# Allegro board ANALYSIS_0109_3.brd
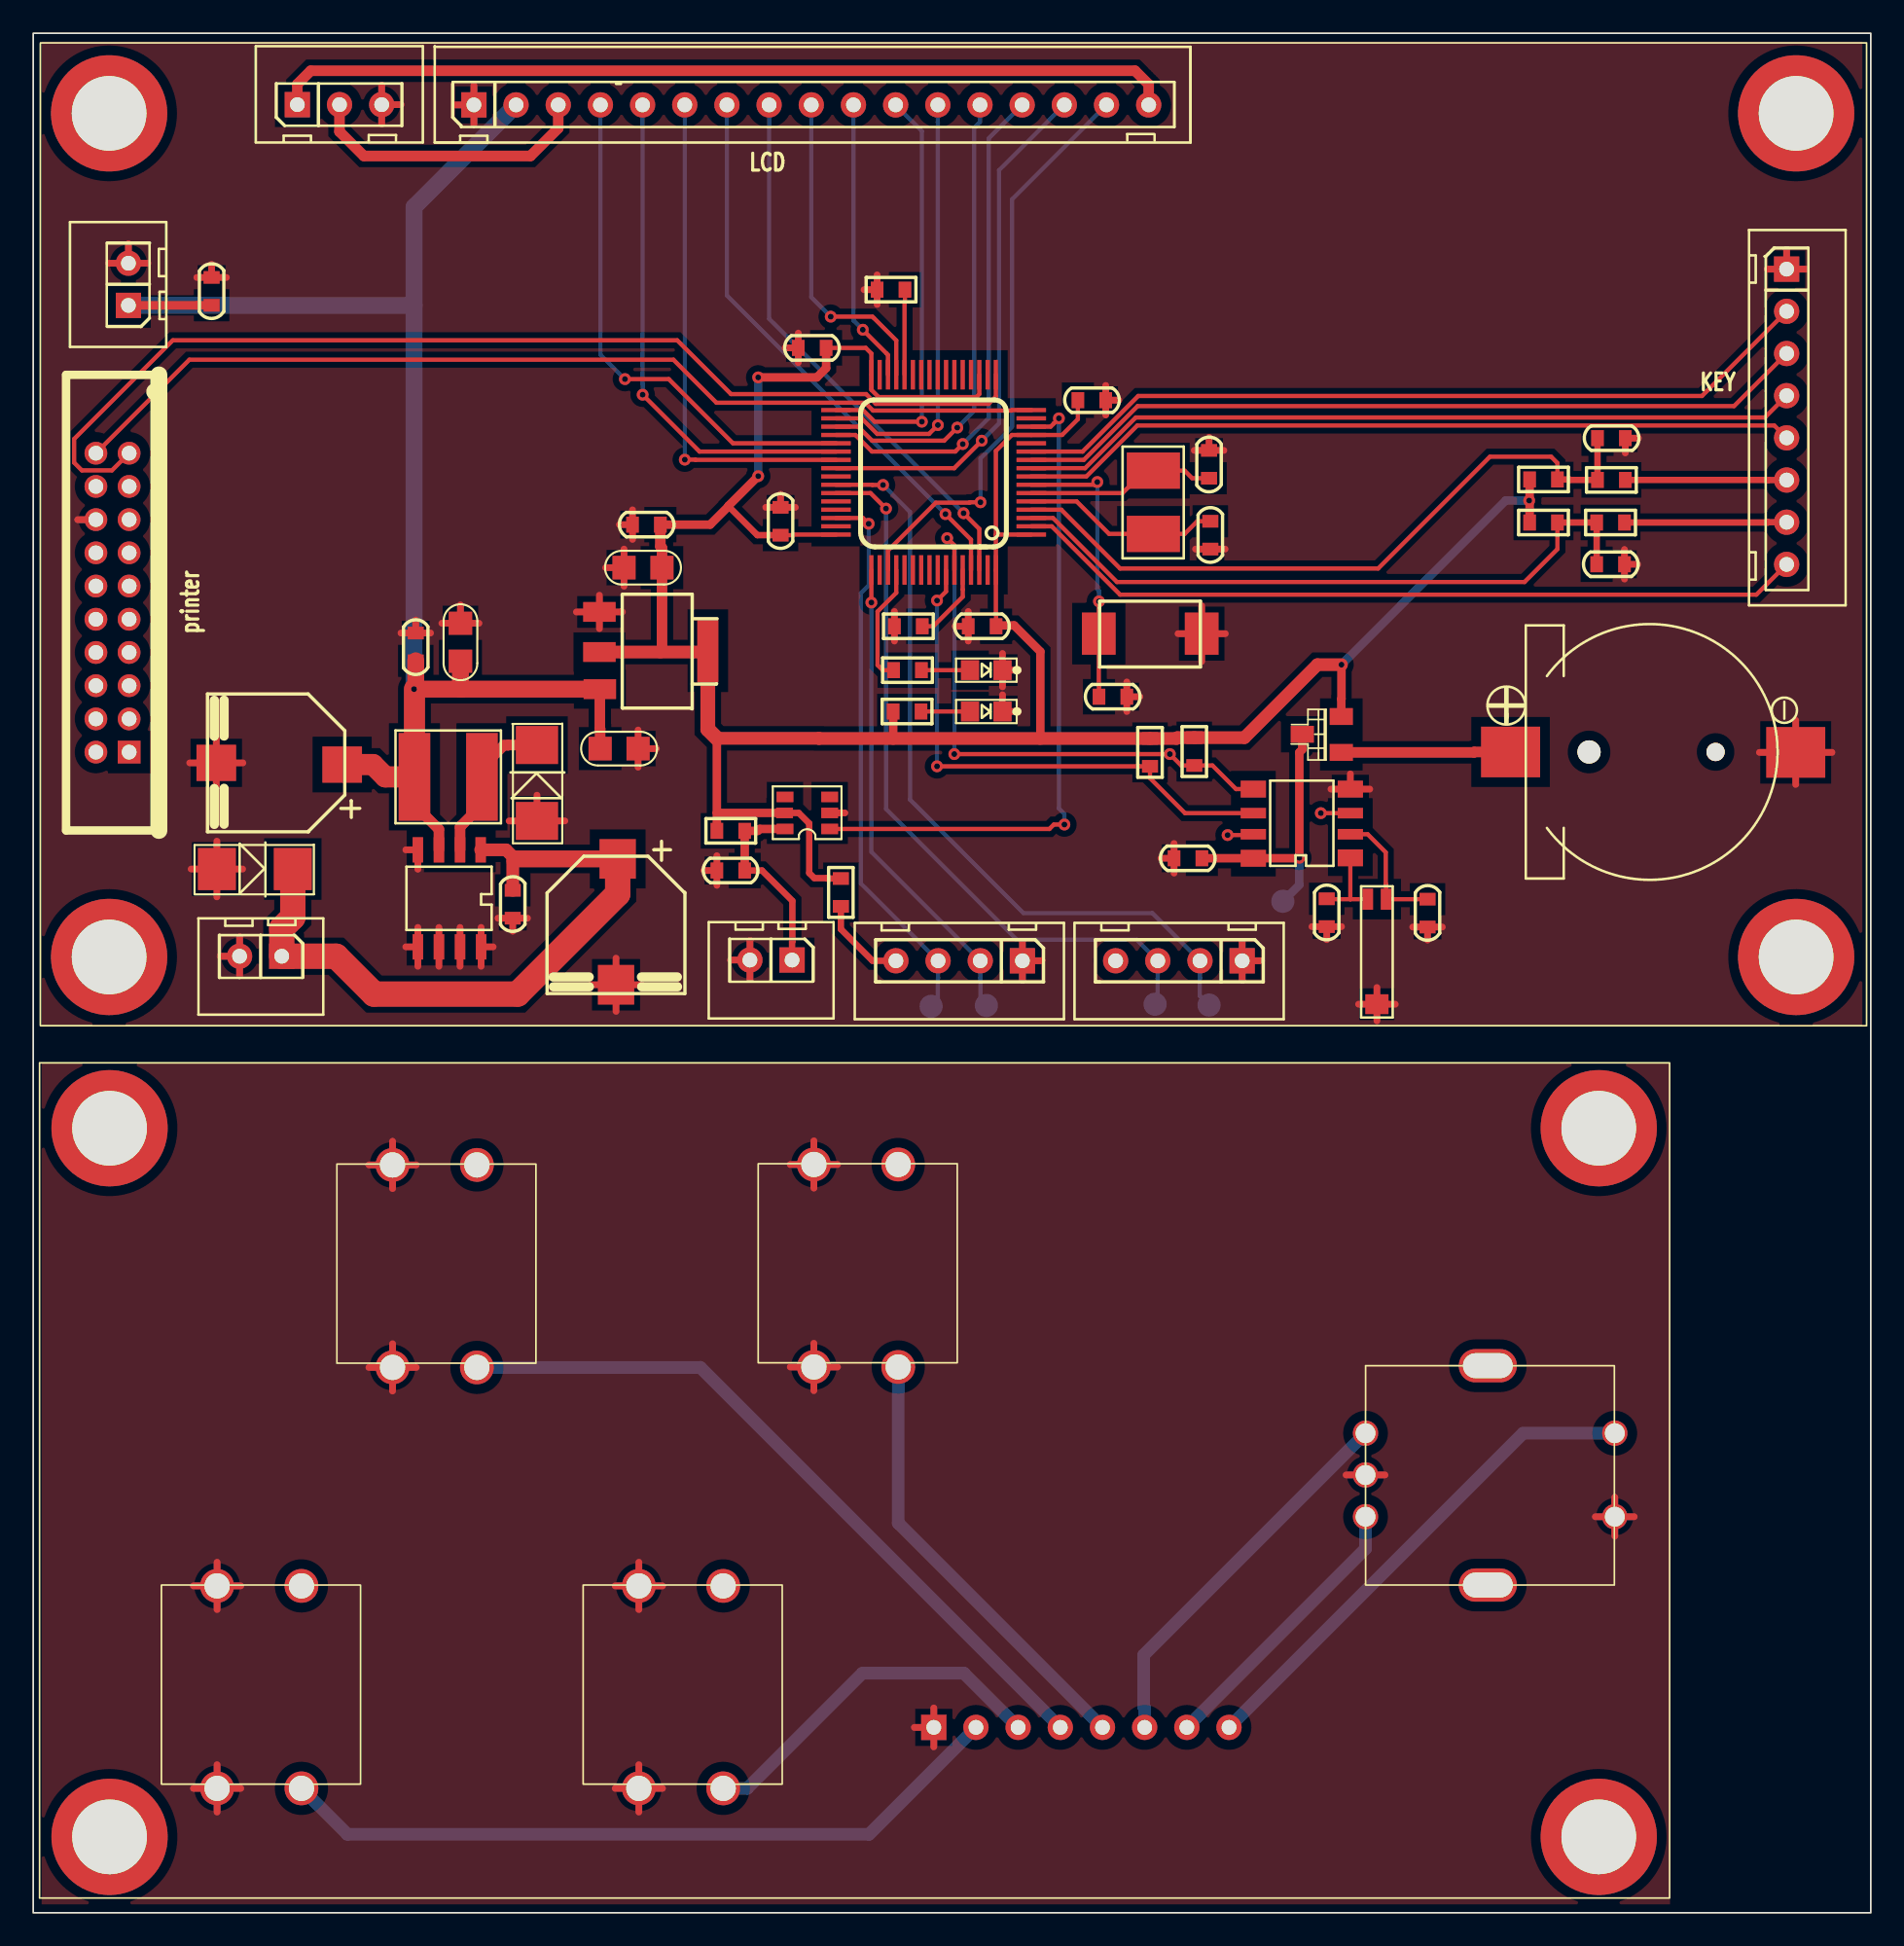
[diagram p0: board, top side]
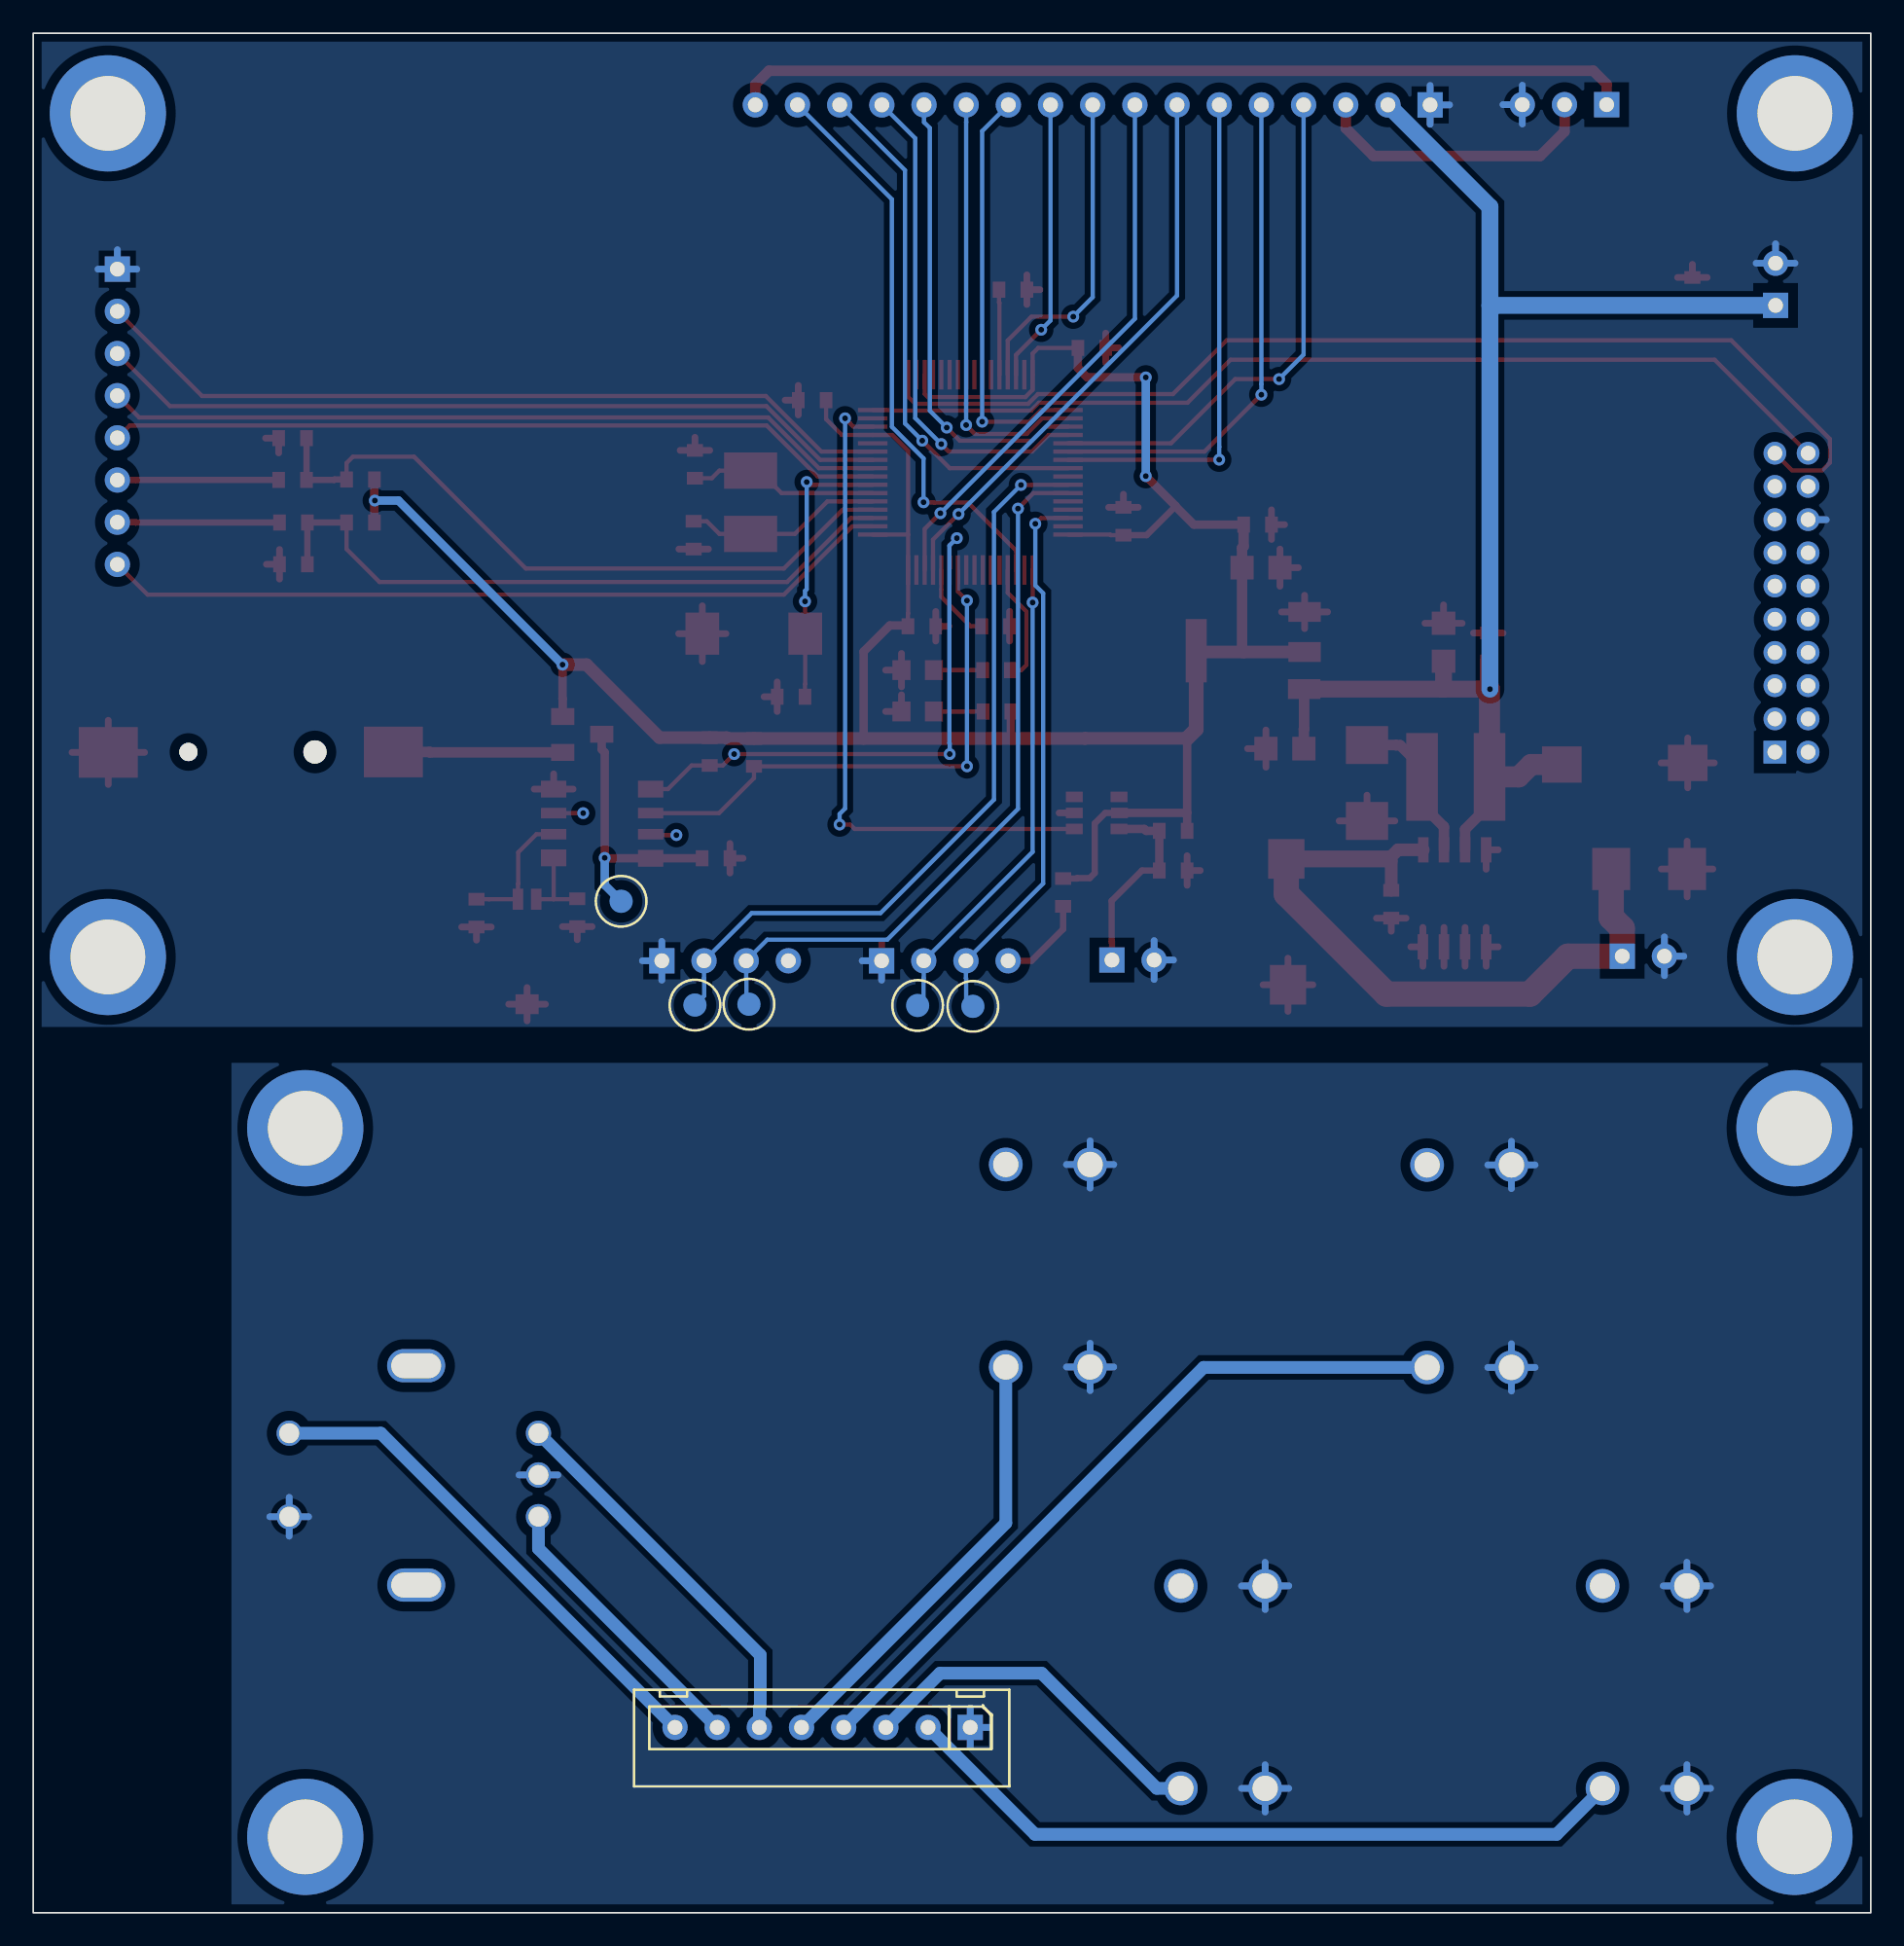
[diagram p1: board, bottom side, seen from below]

Outline 110.67 x 113.18 mm; copper layers: TOP, BOTTOM. Coordinates in mm from the lower left corner of the outline.
Outline path: rectangle 0,0 110.67,113.18

## Placement (name value [footprint] x y rotation side)
C1  0.1uF  [C0603]  46.91 94.23 180 top
C2  0.1uF  [C0603]  63.75 91.08 0 top
C3  0.1uF  [C0603]  45.01 83.79 90 top
C4  0.1uF  [C0603]  10.74 97.64 90 top
C5  0.1uF  [C0603]  42.01 62.76 180 top
C6  0.1uF  [C0603]  57.15 77.47 180 top
C7  15pF  [C0603]  70.82 87.22 270 top
C8  15pF  [C0603]  70.89 82.96 90 top
C9  0.1uF  [C0603]  65.02 73.23 180 top
C10  0.1uF  [C0603]  95 81.2 0 top
C11  0.1uF  [C0603]  95.05 88.8 0 top
C12  0.1uF  [C0603]  69.55 63.5 180 top
C13  5pF  [C0603]  83.97 60.2 90 top
C14  5pF  [C0603]  77.9 60.22 90 top
C15  220uf/35V  [CAP_SMD_8X10D5]  40.15 61.64 270 top
C16  0.1uF  [C0603]  28.88 60.73 90 top
C17  220uf/35V  [CAP_SMD_8X10D5]  16.79 64.19 180 top
C18  0.1uF  [C0603]  23.04 76.23 270 top
C19  10uF  [C0805]  25.73 76.51 270 top
C20  10uF  [C0805]  36.72 81 0 top
C21  10uF  [C0805]  35.28 70.1 180 top
C22  0.1uF  [C0603]  36.93 83.59 0 top
D1  BAT54C  [SOT23-3]  77.61 70.97 0 top
D2  SMBJ12A  [SMA]  13.35 62.85 180 top
D3  SS34  [SMA]  30.34 68.03 270 top
H1  NC/mechanical _pad  [HOLE_4D5MM]  4.57 57.56 0 top
H2  NC/mechanical _pad  [HOLE_4D5MM]  4.57 108.36 0 top
H3  NC/mechanical _pad  [HOLE_4D5MM]  106.17 108.36 0 top
H4  NC/mechanical _pad  [HOLE_4D5MM]  106.17 57.56 0 top
H5  NC/mechanical _pad  [HOLE_4D5MM]  4.6 47.24 0 top
H6  NC/mechanical _pad  [HOLE_4D5MM]  4.6 4.57 0 top
H7  NC/mechanical _pad  [HOLE_4D5MM]  94.28 4.57 0 top
H8  NC/mechanical _pad  [HOLE_4D5MM]  94.28 47.24 0 top
J1  HEADER 8  [XH-8A]  54.23 11.15 0 bottom
J2  HEADER 5  [SW3_2]  85.32 26.09 0 top
J3  -  [XH-2A]  5.73 96.79 90 top
J4  HEADER 20X2  [HEADER10X2_2MMP]  4.78 78.89 180 top
J5  HEADER 2  [XH-2A]  45.7 57.37 180 top
J8  HEADER 8  [XH-8A]  105.61 98.98 270 top
J9  LCD  [XH-17A]  29.48 95.62 0 top
JP_1  -  [XH-2A]  14.97 57.6 180 top
JP_SWD1  -  [XH-4A]  59.58 57.33 180 top
JS_BAT1  BAT  [CR1220_SOCKET_V1]  97.26 69.9 270 top
JS_USART1  NC/XH-4A  [XH-4A]  72.81 57.33 180 top
KS_REST  KEY_3x6x2d5_2p_SMD  [KEY_3X6X2D5_2P_SMD]  67.22 77.2 0 top
L1  47UH  [CD54]  24.99 68.4 90 top
LED0  LED  [LED0603]  57.41 72.34 180 top
LED1  LED  [LED0603]  57.41 74.83 180 top
NOREF  -  []  0.38 0.89 0 top
NOREF#2  -  []  4.6 4.57 90 top
NOREF#3  -  []  4.6 4.57 0 top
NOREF#4  -  []  49.56 40.23 90 top
NOREF#5  -  []  0.43 53.42 90 top
NOREF#6  -  []  0.38 0.89 90 top
NOREF#7  -  []  4.57 57.56 90 top
NOREF#8  -  []  49.56 39.19 0 top
NOREF#9  -  []  4.57 108.36 0 top
NOREF#10  -  []  0.43 112.6 0 top
R1  220K  [R0603]  42.01 65.15 180 top
R2  10K  [R0603]  90.96 83.72 180 top
R3  10K  [R0603]  90.96 86.31 180 top
R4  10K  [R0603]  52.7 77.47 0 top
R5  10K  [R0603]  51.66 97.74 0 top
R6  10K  [R0603]  95.05 86.28 180 top
R7  10K  [R0603]  95 83.72 180 top
R8  10R  [R0603]  48.64 61.44 90 top
R9  10k  [XH-3A]  15.91 108.88 0 top
R10  10K  [R0603]  67.26 69.88 270 top
R11  10K  [R0603]  69.93 69.93 270 top
R13  3.3K  [R0603]  52.63 72.34 180 top
R14  3.3K  [R0603]  52.65 74.83 180 top
SW1  SW PUSHBUTTON_0  [SW4L]  16.15 7.49 180 top
SW2  SW PUSHBUTTON_0  [SW4L]  41.55 7.49 180 top
SW3  SW PUSHBUTTON_0  [SW4L]  26.72 32.84 180 top
SW4  SW PUSHBUTTON_0  [SW4L]  52.1 32.87 180 top
T1  NC/TEST  [TEST_55C_SMD]  54.08 54.58 180 bottom
T2  NC/TEST  [TEST_55C_SMD]  57.4 54.64 180 bottom
T3  NC/TEST  [TEST_55C_SMD]  75.26 60.91 180 bottom
T4  NC/TEST  [TEST_55C_SMD]  67.56 54.71 180 bottom
T5  NC/TEST  [TEST_55C_SMD]  70.82 54.66 180 bottom
U1  USBLC6-2SC6  [SOT23-6]  46.62 66.23 90 top
U2  STM32F103RB  [LQFP64]  54.23 86.74 180 top
U3  PCF8563T  [SOP8]  79.07 63.68 90 top
U4  XL1509-5.0  [SOIC8]  25.07 61.09 180 top
U5  LM1117-3.3  [SOT-223]  34.15 76 270 top
Y1  8M  [CY5032_2P]  67.46 84.94 90 top
Y2  32.768KHz  [MC_146]  80.92 57.86 270 top

## Library data of the parts
C1-C22 = C
D1 = BAT54C
D2 D3 = DIODE
H1-H8 = PAD
J1 J8 = HEADER 10_0
J2 = 4 HEADER_2
J3 J5 = HEADER 2
J4 = HEADER 10X2_2
J9 = HEADER 22_1
JP_1 = header_3d5_6
JP_SWD1 JS_USART1 = HEADER 4
JS_BAT1 = BATT
KS_REST SW1-SW4 = SW PUSHBUTTON_0
L1 = INDUCTOR_0
LED0 LED1 = LED0603
R1-R8 R10 R11 R13 R14 = R
R9 = R_var_0
T1-T5 = TESTPONT
U1 = USB_MINI_SOCKET_5
U2 = STM32F103
U3 = PCF8563
U4 = XL1509
U5 = 1117
Y1 = CRYSTAL
Y2 = MC_146

## Footprints (pads in the part's own frame, mm; a bottom-side part is the same pattern mirrored in y, then rotated)
C0603
  rect 0.762x0.965 smd: 1(-0.838,0) 2(0.838,0)
C0805
  rect 1.397x1.422 smd: 1(-1.143,0) 2(1.143,0)
CAP_SMD_8X10D5
  rect 2.388x2.184 smd: 1(-1.82,-4.95) 2(5.76,-5.05)
CD54
  rect 5.283x1.905 smd: 1(0,2.032) 2(0,-2.032)
CR1220_SOCKET_V1
  round 1.397 hole 1.397 unplated: (0,-3.556)
  rect 3.048x3.556 smd: 1(0,-8.28) 2(0.025,8.89)
  round 1.092 hole 1.092: 3(0,4.064)
CY5032_2P
  rect 2.184x3.2 smd: 1(-1.905,0) 2(1.905,0)
HEADER10X2_2MMP
  rect 1.372x1.372 hole 0.889: 1(-1,9)
  round 1.372 hole 0.889: 2(1,9) 3(-1,7) 4(1,7) 5(-1,5) 6(1,5) 7(-1,3) 8(1,3) 9(-1,1) 10(1,1) 11(-1,-1) 12(1,-1) 13(-1,-3) 14(1,-3) 15(-1,-5) 16(1,-5) 17(-1,-7) 18(1,-7) 19(-1,-9) 20(1,-9)
HOLE_4D5MM
  round 7 hole 4.5: 1(0,0)
KEY_3X6X2D5_2P_SMD
  rect 2.032x2.54 smd: 1(-3.048,-0.178) 2(3.15,-0.178)
LED0603
  rect 1.092x1.194 smd: 1(0.991,0) 2(-0.965,0)
LQFP64
  rect 1.778x0.254 smd: 1(-5.88,3.749) 2(-5.88,3.251) 3(-5.88,2.751) 4(-5.88,2.25) 5(-5.88,1.75) 6(-5.88,1.25) 7(-5.88,0.749) 8(-5.88,0.249) 9(-5.88,-0.249) 10(-5.88,-0.749) 11(-5.88,-1.25) 12(-5.88,-1.75) 13(-5.88,-2.25) 14(-5.88,-2.751) 15(-5.88,-3.251) 16(-5.88,-3.749) 33(5.88,-3.749) 34(5.88,-3.251) 35(5.88,-2.751) 36(5.88,-2.25) 37(5.88,-1.75) 38(5.88,-1.25) 39(5.88,-0.749) 40(5.88,-0.249) 41(5.88,0.249) 42(5.88,0.749) 43(5.88,1.25) 44(5.88,1.75) 45(5.88,2.25) 46(5.88,2.751) 47(5.88,3.251) 48(5.88,3.749)
  rect 0.254x1.778 smd: 17(-3.749,-5.88) 18(-3.251,-5.88) 19(-2.751,-5.88) 20(-2.25,-5.88) 21(-1.75,-5.88) 22(-1.25,-5.88) 23(-0.749,-5.88) 24(-0.249,-5.88) 25(0.249,-5.88) 26(0.749,-5.88) 27(1.25,-5.88) 28(1.75,-5.88) 29(2.25,-5.88) 30(2.751,-5.88) 31(3.251,-5.88) 32(3.749,-5.88) 49(3.749,5.88) 50(3.251,5.88) 51(2.751,5.88) 52(2.25,5.88) 53(1.75,5.88) 54(1.25,5.88) 55(0.749,5.88) 56(0.249,5.88) 57(-0.249,5.88) 58(-0.749,5.88) 59(-1.25,5.88) 60(-1.75,5.88) 61(-2.25,5.88) 62(-2.751,5.88) 63(-3.251,5.88) 64(-3.749,5.88)
MC_146
  rect 1.27x0.635 smd: 1(-3.173,0.55) 2(-3.173,-0.55)
  rect 1.194x1.397 smd: 3(3.15,0)
R0603
  rect 0.762x0.965 smd: 1(-0.838,0) 2(0.838,0)
SMA
  rect 2.286x2.54 smd: 1(2.286,0) 2(-2.286,0)
SOIC8
  rect 0.635x1.524 smd: 1(-1.88,-2.921) 2(-0.635,-2.921) 3(0.635,-2.921) 4(1.905,-2.921) 5(1.905,2.921) 6(0.635,2.921) 7(-0.635,2.921) 8(-1.905,2.921)
SOP8
  rect 1.016x1.524 smd: 1(-0.152,-0.254) 4(3.988,-0.254) 5(3.988,5.588) 8(-0.178,5.588)
  rect 0.635x1.524 smd: 2(1.27,-0.254) 3(2.54,-0.254) 6(2.54,5.588) 7(1.27,5.588)
SOT23-3
  rect 1.397x1.016 smd: 1(1.168,-1.092) 2(1.168,1.067) 3(-1.181,0)
SOT23-6
  rect 0.635x1.016 smd: 1(-0.965,-1.346) 2(0,-1.346) 3(0.965,-1.346) 4(0.965,1.346) 5(0,1.372) 6(-0.965,1.346)
SOT-223
  rect 1.194x1.956 smd: 1(-2.337,-0.051) 2(0.076,-0.051) 3(2.311,-0.025)
  rect 3.81x1.27 smd: 4(0,6.477)
SW3_2
  round 1.524 hole 1.194: 1(-5.08,2.794) 2(-5.08,0.279) 3(-5.08,-2.235) 4(9.931,2.794) 5(9.931,-2.235)
  oval 3.5x2 hole 3x1.5: 6(2.286,6.858) 7(2.286,-6.35)
SW4L
  round 2.032 hole 1.524: 1(0,0) 2(0,-12.192) 3(5.08,0) 4(5.08,-12.192)
TEST_55C_SMD
  round 1.397 smd: 1(0,0)
XH-2A
  rect 1.524x1.524 hole 0.889: 1(0,0)
  round 1.524 hole 0.889: 2(2.54,0)
XH-3A
  rect 1.524x1.524 hole 0.889: 1(0,0)
  round 1.524 hole 0.889: 2(2.54,0) 3(5.08,0)
XH-4A
  rect 1.524x1.524 hole 0.889: 1(0,0)
  round 1.524 hole 0.889: 2(2.54,0) 3(5.08,0) 4(7.62,0)
XH-8A
  rect 1.524x1.524 hole 0.889: 1(0.005,-0.013)
  round 1.524 hole 0.889: 2(2.545,-0.013) 3(5.085,-0.013) 4(7.625,-0.013) 5(10.165,-0.013) 6(12.705,-0.013) 7(15.245,-0.013) 8(17.785,-0.013)
XH-17A
  rect 1.524x1.524 hole 0.889: 1(-2.942,13.25)
  round 1.524 hole 0.889: 2(-0.402,13.25) 3(2.138,13.25) 4(4.678,13.25) 5(7.218,13.25) 6(9.758,13.25) 7(12.298,13.25) 8(14.838,13.25) 9(17.378,13.25) 10(19.918,13.25) 11(22.458,13.25) 12(24.998,13.25) 13(27.538,13.25) 14(30.078,13.25) 15(32.618,13.25) 16(35.158,13.25) 17(37.698,13.25)

## Nets
GND: C1.2 C2.2 C3.2 C4.2 C5.2 C6.2 C7.1 C8.1 C9.1 C10.2 C11.2 C12.2 C13.1 C14.1 C15.2 C16.1 C17.2 C18.1 C19.1 C20.1 C21.1 C22.1 D2.1 D3.1 J1.1 J2.2(G1) J2.5(G2) J3.2 J4.16(GND) J5.2 J8.1 J9.1(VSS) JP_1.2 JP_SWD1.1 JS_BAT1.2(-) JS_USART1.1 KS_REST.2 LED0.2(CATHODE) LED1.2(CATHODE) R4.1 R5.1 R9.3 SW1.3 SW1.4 SW2.3 SW2.4 SW3.3 SW3.4 SW4.3 SW4.4 U1.2(GND) U2.12(VSSA) U2.18(VSS_4) U2.31(VSS_1) U2.47(VSS_2) U2.63(VSS_3) U3.4(VSS) U4.4(EN) U4.5(GND1) U4.6(GND2) U4.7(GND3) U4.8(GND4) U5.1 Y2.3(GND)
VCC_5V: C4.1 C17.1 C18.2 C19.2 C21.2 J3.1 J9.2(VDD) L1.1 U4.3(FB) U5.3(IN)
VCC_9V: C15.1 C16.2 D2.2 JP_1.1 U4.1(VIN)
VDD_3V3: C1.1 C2.1 C3.1 C6.1 C20.2 C22.2 D1.2(C2) R1.2 R2.2 R3.2 R8.2 R10.1 R11.1 R13.2 U1.5(VBUS) U2.1(VBAT) U2.13(VDDA) U2.19(VDD_4) U2.32(VDD_1) U2.48(VDD_2) U2.64(VDD_3) U5.2(OUT) U5.4
BOOT0: R4.2 U2.60(BOOT0)
BOOT1: R5.2 U2.28(PB2/BOOT1)
EC11_A: C11.1 R3.1 R6.2 U2.4(PC15-OSC32_OUT)
EC11_B: C10.1 R2.1 R7.2 U2.3(PC14-OSC32_IN)
EC11_C: J8.8 U2.2(PC13-TAMPER-RTC)
EC11_K: J1.8 J2.4(KEY)
I2C1_SCL: R10.2 U2.58(PB6/I2C1_SCL/USART1_TX) U3.6(SCL)
I2C1_SDA: R11.2 U2.59(PB7/I2C1_SDA/USART1_RX) U3.5(SDA)
KEY1: J1.2 SW1.1
KEY2: J1.3 SW2.1
KEY3: J1.4 SW3.1
KEY4: J1.5 SW4.1
KEY_1: J8.2 U2.11(PC3/ADC12_IN13)
KEY_2: J8.3 U2.10(PC2/ADC12_IN12)
KEY_3: J8.4 U2.9(PC1/ADC12_IN11)
KEY_4: J8.5 U2.8(PC0/ADC12_IN10)
PB8_D0: J9.7(D0) U2.61(PB8/I2C1_SCL/CANRX)
PB9_D1: J9.8(D1) U2.62(PB9/I2C1_SDA/CANTX)
PB10_D2: J9.9(D2) U2.29(PB10/TIM2_CH3/USART3_TX)
PB11_D3: J9.10(D3) U2.30(PB11/TIM2_CH4/USART3_RX)
PB12_D4: J9.11(D4) U2.33(PB12/TIM1_BKIN/SPI2_NSS)
PB13_D5: J9.12(D5) U2.34(PB13/TIM1_CH1N/SPI2_SCK)
PB14_D6: J9.13(D6) U2.35(PB14/TIM1_CH2N/SPI2_MISO)
PB15_D7: J9.14(D7) U2.36(PB15/TIM1_CH3N/SPI2_MOSI)
PC6_A0: J9.4(A0) U2.37(PC6/TIM3_CH1)
PC7_WR: J9.5(WR) U2.38(PC7/TIM3_CH2)
PC8_RD: J9.6(RD) U2.39(PC8/TIM3_CH3)
PC9_CS: J9.15(CS) U2.40(PC9/TIM3_CH4)
PC10_REST: J9.16(REST) U2.51(PC10)
PC11_LED0: R14.2 U2.52(PC11)
STM32_REST: C9.2 KS_REST.1 U2.7(NRST)
SWCLK: JP_SWD1.2 T2.1 U2.49(PA14/JTCK/SWCLK)
SWDIO: JP_SWD1.3 T1.1 U2.46(PA13/JTMS/SWDIO)
USART1_RX_PA10: JS_USART1.3 T4.1 U2.43(PA10/USART1_RX/TIM1_CH3)
USART1_TX_PA9: JS_USART1.2 T5.1 U2.42(PA9/USART1_TX/TIM1_CH2)
USART2_RXD: J4.19(TXD) U2.17(PA3/USART2_RX/ADC12_IN3/TIM2_CH)
USART2_TXD: J4.20(RXD) U2.16(PA2/USART2_TX/ADC12_IN2/TIM2_CH)
N201627: C12.1 D1.3(A) T3.1 U3.8(VDD)
N201649: C14.2 U3.1(OSCI) Y2.2
N202031: JP_SWD1.4 R8.1
N202175: C7.2 U2.6(PD1 OSC_OUT/CANTX) Y1.2
N202187: C8.2 U2.5(PD0 OSC_IN/CANRX) Y1.1
N202733: D1.1(C1) JS_BAT1.1(+)
N203157: C13.2 U3.2(OSCO) Y2.1
N208876: D3.2 L1.2 U4.2(OUTPUT)
N211508: U1.1(I/O1) U2.14(PA0-WKUP/USART2_CTS/ADC12_IN0/T)
N214712: C5.1 J5.1 R1.1 U1.6(I/O1X)
N217465: J8.7 R7.1
N217476: J8.6 R6.1
N232980: J9.17(VEE) R9.1
N235811: J1.7 J2.3(B)
N235857: J1.6 J2.1(A)
N261392: J9.3(V0) R9.2
N262227: LED1.1(ANODE) R14.1
N2617950: LED0.1(ANODE) R13.1

Pads without a net: H1 1; H2 1; H3 1; H4 1; H5 1; H6 1; H7 1; H8 1; J2 6 7; J4 1 2 3 4 5 6 7 8 9 10 11 12 13 14 15 17 18; JS_BAT1 3; JS_USART1 4; SW1 2; SW2 2; SW3 2; SW4 2; U1 3 4; U2 15 20 21 22 23 24 25 26 27 41 44 45 50 53 54 55 56 57; U3 3 7

## Via types
v1: diameter 0.711, hole 0.356, TOP to BOTTOM, 34 vias

## Routing (per net, layer and track width the routed paths; a pad name or vN(x,y) marks a point on that pad's centre or on a via; arc(x,y) is an arc through that point)
GND: length 294.4
  TOP w0.406: 59.58,56.16 JP_SWD1.1 ; JP_SWD1.1 60.74,57.33 ; JP_SWD1.1 59.58,58.5 ; 24.43,59.33 U4.6 24.43,57 ; 22.15,77.06 C18.1 ; C18.1 23.04,77.85 ; C18.1 23.93,77.06 ; 47.02,31.45 SW4.3 ; SW4.3 47.02,34.29 ; SW4.3 45.59,32.87 ; SW4.3 48.44,32.87 ; U4.8 27.7,58.17 ; U4.8 26.97,57 ; U4.8 26.97,59.33 ; 46.08,93.34 C1.2 ; C1.2 46.08,95.12 ; C1.2 45.29,94.23 ; 22.44,64.01 U4.4 23.16,62.84 ; C22.1 36.09,84.48 ; C22.1 35.31,83.59 ; C22.1 36.09,82.7 ; SW2.4 36.47,21.11 ; SW2.4 36.47,18.26 ; SW2.4 35.05,19.68 ; SW2.4 37.9,19.68 ; D3.1 32.02,65.75 ; D3.1 28.66,65.75 ; D3.1 30.34,67.3 ; 78.16,67.67 U3.4 ; U3.4 80.49,67.67 ; U3.4 79.32,68.58 ; SW1.3 12.5,7.49 ; SW1.3 9.65,7.49 ; SW1.3 11.07,6.07 ; SW1.3 11.07,8.92 ; C3.2 45.01,85.42 ; C3.2 44.12,84.63 ; C3.2 45.9,84.63 ; 95.25,22.68 J2.5 ; J2.5 96.42,23.85 ; J2.5 95.25,25.02 ; J2.5 94.08,23.85 ; C14.1 78.79,59.39 ; C14.1 77.01,59.39 ; C14.1 77.9,58.6 ; JP_1.2 12.43,58.77 ; JP_1.2 12.43,56.43 ; JP_1.2 11.26,57.6 ; 11.03,67.74 C17.2 ; C17.2 12.63,69.24 ; C17.2 9.43,69.24 ; C17.2 11.03,70.74 ; 53.07,11.16 J1.1 ; J1.1 54.24,12.33 ; J1.1 54.24,10 ; C9.1 65.86,74.12 ; C9.1 65.86,72.34 ; C9.1 66.65,73.23 ; 27.99,59.89 C16.1 ; C16.1 29.77,59.89 ; C16.1 28.88,59.11 ; 25.7,59.33 U4.7 25.7,57 ; 56.31,76.58 C6.2 ; C6.2 56.31,78.36 ; C6.2 55.52,77.47 ; 81.41,26.37 J2.2 79.07,26.37 ; 67.92,63.5 C12.2 ; C12.2 68.71,62.61 ; C12.2 68.71,64.39 ; C10.2 96.62,81.2 ; C10.2 95.83,80.31 ; C10.2 95.83,82.09 ; C19.1 26.85,77.65 ; C19.1 25.73,78.76 ; C19.1 24.61,77.65 ; 83.08,59.36 C13.1 ; C13.1 84.86,59.36 ; C13.1 83.97,58.57 ; J3.2 5.73,100.5 ; J3.2 6.9,99.33 ; J3.2 4.57,99.33 ; SW1.4 11.07,21.11 ; SW1.4 9.65,19.68 ; SW1.4 11.07,18.26 ; SW1.4 12.5,19.68 ; Y2.3 80.92,55.72 ; Y2.3 82.03,54.71 ; Y2.3 79.82,54.71 ; Y2.3 80.92,53.71 ; 64.59,90.2 C2.2 ; C2.2 65.38,91.08 ; C2.2 64.59,91.97 ; J9.1 26.54,110.03 ; J9.1 26.54,107.7 ; J9.1 25.37,108.87 ; R5.1 50.83,98.63 ; R5.1 50.83,96.85 ; R5.1 50.04,97.74 ; C4.2 10.74,99.26 ; C4.2 9.86,98.48 ; C4.2 11.63,98.48 ; KS_REST.2 70.37,78.7 ; KS_REST.2 71.79,77.03 ; KS_REST.2 70.37,75.35 ; KS_REST.2 68.95,77.03 ; 45.59,45.06 SW4.4 ; SW4.4 47.02,46.48 ; SW4.4 48.44,45.06 ; SW4.4 47.02,43.64 ; LED1.2 59.33,74.83 ; LED1.2 58.38,73.83 ; LED1.2 58.38,75.83 ; 58.38,73.34 LED0.2 59.33,72.34 ; C21.1 36.43,71.22 ; C21.1 36.43,68.99 ; C21.1 37.53,70.1 ; 96.67,88.8 C11.2 95.89,87.91 ; 11.06,61.18 D2.1 ; D2.1 9.51,62.85 ; D2.1 12.61,62.85 ; D2.1 11.06,64.53 ; SW2.3 36.47,8.92 ; SW2.3 35.05,7.49 ; SW2.3 36.47,6.07 ; SW2.3 37.9,7.49 ; 51.87,78.36 R4.1 51.87,76.58 ; 20.22,45.03 SW3.4 ; SW3.4 21.64,46.46 ; SW3.4 23.06,45.03 ; SW3.4 21.64,43.61 ; 34.1,77.33 U5.1 ; U5.1 35.48,78.33 ; U5.1 32.72,78.33 ; U5.1 34.1,79.34 ; 40.39,62.76 C5.2 ; C5.2 41.17,63.65 ; C5.2 41.17,61.87 ; C15.2 35.1,57.48 ; C15.2 36.6,55.88 ; C15.2 33.6,55.88 ; C15.2 35.1,54.28 ; U1.2 48.88,66.23 ; 34.48,81 C20.1 ; C20.1 35.58,79.88 ; C20.1 35.58,82.12 ; J8.1 105.6,100.14 ; J8.1 104.43,98.98 ; J8.1 106.77,98.98 ; C7.1 71.7,88.06 ; C7.1 70.82,88.85 ; C7.1 69.93,88.06 ; R9.3 22.16,108.88 ; R9.3 20.99,110.05 ; R9.3 20.99,107.71 ; U4.5 23.16,59.33 ; U4.5 22.44,58.17 ; U4.5 23.16,57 ; J5.2 43.16,58.54 ; J5.2 43.16,56.2 ; J5.2 41.99,57.37 ; JS_USART1.1 72.81,58.5 ; JS_USART1.1 73.98,57.33 ; JS_USART1.1 72.81,56.16 ; 2.68,83.89 J4.16 ; 71.78,82.12 C8.1 70,82.12 ; SW3.3 23.06,32.84 ; SW3.3 21.64,34.26 ; SW3.3 21.64,31.42 ; SW3.3 20.22,32.84 ; 103.96,69.88 JS_BAT1.2 ; JS_BAT1.2 106.15,71.81 ; JS_BAT1.2 108.33,69.88 ; JS_BAT1.2 106.15,67.94
  BOTTOM w0.406: SW2.3 37.9,7.49 ; SW2.3 35.05,7.49 ; SW2.3 36.47,6.07 ; SW2.3 36.47,8.92 ; 35.05,19.68 SW2.4 ; SW2.4 36.47,18.26 ; SW2.4 36.47,21.11 ; SW2.4 37.9,19.68 ; 41.99,57.37 J5.2 ; J5.2 43.16,56.2 ; J5.2 43.16,58.54 ; SW1.3 11.07,8.92 ; SW1.3 9.65,7.49 ; SW1.3 12.5,7.49 ; SW1.3 11.07,6.07 ; 60.74,57.33 JP_SWD1.1 59.58,56.16 ; 4.57,99.33 J3.2 ; J3.2 5.73,100.5 ; J3.2 6.9,99.33 ; SW3.4 23.06,45.03 ; SW3.4 21.64,43.61 ; SW3.4 20.22,45.03 ; SW3.4 21.64,46.46 ; JP_1.2 12.43,58.77 ; JP_1.2 11.26,57.6 ; JP_1.2 12.43,56.43 ; J2.5 95.25,25.02 ; J2.5 96.42,23.85 ; J2.5 95.25,22.68 ; J2.5 94.08,23.85 ; 53.07,11.16 J1.1 ; J1.1 54.24,12.33 ; J1.1 54.24,10 ; 47.02,43.64 SW4.4 ; SW4.4 48.44,45.06 ; SW4.4 47.02,46.48 ; SW4.4 45.59,45.06 ; 45.59,32.87 SW4.3 ; SW4.3 48.44,32.87 ; SW4.3 47.02,34.29 ; SW4.3 47.02,31.45 ; 81.41,26.37 J2.2 79.07,26.37 ; 72.81,56.16 JS_USART1.1 ; JS_USART1.1 72.81,58.5 ; JS_USART1.1 73.98,57.33 ; 20.99,107.71 R9.3 ; R9.3 20.99,110.05 ; R9.3 22.16,108.88 ; 20.22,32.84 SW3.3 ; SW3.3 21.64,31.42 ; SW3.3 23.06,32.84 ; SW3.3 21.64,34.26 ; 25.37,108.87 J9.1 ; J9.1 26.54,107.7 ; J9.1 26.54,110.03 ; 2.68,83.89 J4.16 ; SW1.4 12.5,19.68 ; SW1.4 11.07,21.11 ; SW1.4 9.65,19.68 ; SW1.4 11.07,18.26 ; J8.1 105.6,100.14 ; J8.1 104.43,98.98 ; J8.1 106.77,98.98
VCC_5V: length 93.1
  TOP w0.508: J3.1 9.85,96.79 9.86,96.8 C4.1
  TOP w0.635: U5.3 34.12,71.3 34.14,71.29 C21.2 ; L1.1 22.96,66.71 24.43,65.24 U4.3
  TOP w1.016: 25.78,73.69 25.73,73.74 C19.2 ; 25.78,73.69 22.96,73.69 ; 25.78,73.69 U5.3 ; 22.96,73.69 v1(22.94,73.69) ; 22.96,73.69 23.04,73.76 C18.2
  TOP w1.27: 22.96,73.69 L1.1 21.2,68.4 20.46,69.14 C17.1
  BOTTOM w1.016: 22.94,96.79 v1(22.94,73.69) ; 22.94,96.79 J3.1 ; 22.94,96.79 22.94,102.72 J9.2
VCC_9V: length 41.7
  TOP w0.762: C16.2 28.88,63.32 29.02,63.46 28.47,64.01 U4.1
  TOP w1.016: C15.1 29.02,63.46
  TOP w1.524: D2.2 15.63,59.94 14.97,59.28 JP_1.1 18.24,57.6 20.52,55.32 29.17,55.32 35.2,61.35 C15.1
VDD_3V3: length 165.4
  TOP w0.254: C3.1 45.77,82.96 45.81,82.99 U2.48 ; C1.1 50.14,94.23 50.48,93.89 U2.32 50.48,91.71 50.91,91.27 56.8,91.27 56.98,91.45 U2.19 ; 57.98,82.99 57.98,88.03 58.94,88.99 U2.13 61.96,88.99 62.92,89.94 C2.1 ; 57.98,82.99 U2.64 57.98,78.24 57.99,78.23 C6.1 ; 57.98,82.99 U2.1
  TOP w0.381: U1.5 46.1,66.23 46.74,65.6 46.74,62.61 47.04,62.31 47.79,62.31 47.82,62.28 R8.2 ; 41.87,84.7 43.61,82.96 C3.1
  TOP w0.508: 90.12,84.99 90.09,85.01 v1(90.09,85.04) ; 90.12,84.99 R3.2 ; 90.12,84.99 R2.2 ; R13.2 51.79,70.71 ; U1.5 41.19,66.23 41.17,66.24 ; 41.17,66.24 41.17,70.72 ; 41.17,66.24 R1.2 ; 60.66,70.71 60.66,75.95 59.08,77.52 58.04,77.52 C6.1 ; D1.2 78.78,73.09 78.79,73.1 v1(78.79,75.16) ; C22.2 40.77,83.59 41.87,84.7 41.87,84.72 v1(43.66,86.51) ; v1(43.66,92.46) 47.19,92.46 47.75,93.01 C1.1
  TOP w0.635: 37.77,75.92 37.87,76.02 C20.2 37.87,82.18 37.77,82.28 C22.2
  TOP w0.762: v1(78.79,75.16) 77.34,75.16 72.95,70.76 R11.1 68.91,70.76 68.86,70.71 R10.1 47.33,70.71 47.32,70.72 41.17,70.72 ; U5.4 40.55,75.92 U5.2
  TOP w0.889: 41.17,70.72 40.63,71.27 U5.4
  BOTTOM w0.508: v1(90.09,85.04) 88.67,85.04 v1(78.79,75.16) ; v1(43.66,86.51) v1(43.66,92.46)
BOOT0: length 4.8
  TOP w0.254: R4.2 54.2,77.47 55.98,79.25 55.98,79.69 55.98,79.69 U2.60
BOOT1: length 5.1
  TOP w0.254: U2.28 52.48,96.95 52.5,96.98 R5.2
EC11_A: length 42
  TOP w0.254: U2.4 61.92,84.49 65.46,80.95 81,80.95 87.73,87.68 91.41,87.68 91.8,87.3 R3.1
  TOP w0.381: R3.1 92.52,86.31 92.54,86.28 R6.2 C11.1
EC11_B: length 40.6
  TOP w0.254: R2.1 91.8,82.12 89.81,80.14 65.27,80.14 61.42,83.99 U2.3
  TOP w0.381: R2.1 R7.2 C10.1
EC11_C: length 47.9
  TOP w0.254: J8.8 103.78,79.38 65.46,79.38 61.34,83.49 U2.2
EC11_K: length 30.6
  BOTTOM w0.762: J1.8 89.73,28.88 J2.4
I2C1_SCL: length 32.7
  TOP w0.254: v1(54.43,69.04) R10.2 67.26,68.33 69.37,66.22 U3.6 ; U2.58 54.98,79.56 v1(54.43,79.02)
  BOTTOM w0.254: v1(54.43,69.04) v1(54.43,79.02)
I2C1_SDA: length 34.2
  TOP w0.254: U3.5 72.44,67.67 71.02,69.09 R11.2 69.14,69.09 v1(68.45,69.77) v1(55.47,69.77) ; v1(55.04,82.78) 55.48,82.34 U2.59
  BOTTOM w0.254: v1(55.04,82.78) 55.49,82.33 55.49,70.43 55.47,70.41 v1(55.47,69.77)
KEY1: length 44.4
  BOTTOM w0.762: SW1.1 18.92,4.72 50.34,4.72 J1.2
KEY2: length 22
  BOTTOM w0.762: J1.3 56.05,14.43 49.94,14.43 43,7.49 SW2.1
KEY3: length 44.1
  BOTTOM w0.762: J1.4 40.18,32.84 SW3.1
KEY4: length 26.8
  BOTTOM w0.762: SW4.1 52.1,23.47 J1.5
KEY_1: length 49
  TOP w0.254: J8.2 100.5,91.34 66.55,91.34 63.2,87.99 U2.11
KEY_2: length 48.1
  TOP w0.254: U2.10 63.27,87.49 66.51,90.73 102.43,90.73 J8.3
KEY_3: length 47.3
  TOP w0.254: J8.4 104.29,90.04 66.4,90.04 63.35,86.99 U2.9
KEY_4: length 47.1
  TOP w0.254: U2.8 63.42,86.49 66.49,89.56 104.85,89.56 J8.5
Net_10: length 1.8
  TOP w0.254: v1(77.55,66.22) 79.32,66.22
Net_11: length 1.6
  TOP w0.254: 73.48,64.95 73.43,64.9 v1(71.93,64.9)
PB8_D0: length 34.1
  TOP w0.254: v1(54.94,84.23) 56.48,82.69 U2.61
  BOTTOM w0.254: J9.7 41.78,97.39 v1(54.94,84.23)
PB9_D1: length 33.3
  TOP w0.254: v1(56.03,84.28) 56.98,83.33 U2.62
  BOTTOM w0.254: v1(56.03,84.28) 44.32,95.99 J9.8
PB10_D2: length 19.8
  TOP w0.254: U2.29 51.98,94.68 50.65,96.01 50.55,96.11 v1(48.03,96.11)
  BOTTOM w0.254: v1(48.03,96.11) 46.86,97.29 J9.9
PB11_D3: length 17.1
  TOP w0.254: U2.30 51.48,93.81 51.38,93.91 v1(49.96,95.33)
  BOTTOM w0.254: J9.10 49.4,95.89 v1(49.96,95.33)
PB12_D4: length 25.2
  TOP w0.254: v1(53.52,89.79) 50.67,89.79 49.97,90.49 U2.33
  BOTTOM w0.254: J9.11 53.52,107.29 v1(53.52,89.79)
PB13_D5: length 26
  TOP w0.254: U2.34 49.9,89.99 50.83,89.05 53.95,89.05 v1(54.48,89.59)
  BOTTOM w0.254: J9.12 54.48,107.82 54.48,107.82 54.48,90.91 54.48,90.91 v1(54.48,89.59)
PB14_D6: length 28
  TOP w0.254: v1(55.65,89.43) 54.86,88.65 50.52,88.65 49.68,89.49 U2.35
  BOTTOM w0.254: v1(55.65,89.43) 56.67,90.45 56.67,107.47 57.02,107.82 J9.13
PB15_D7: length 30.1
  TOP w0.254: v1(55.98,88.44) 55.53,87.99 50.51,87.99 49.52,88.99 U2.36
  BOTTOM w0.254: v1(55.98,88.44) 57.55,90.01 57.55,106.85 J9.14
PC6_A0: length 31.4
  TOP w0.254: U2.37 42.14,88.49 38.28,92.35 v1(35.64,92.35)
  BOTTOM w0.254: v1(35.64,92.35) 34.16,93.83 J9.4
PC7_WR: length 30.5
  TOP w0.254: v1(36.7,91.41) 40.13,87.99 U2.38
  BOTTOM w0.254: J9.5 36.7,92.05 36.7,92.05 v1(36.7,91.41)
PC8_RD: length 30.5
  TOP w0.254: U2.39 39.89,87.49 39.88,87.5 v1(39.24,87.5)
  BOTTOM w0.254: J9.6 39.24,88.26 39.24,88.26 v1(39.24,87.5)
PC9_CS: length 31.7
  TOP w0.254: v1(57.12,88.65) 55.47,86.99 U2.40
  BOTTOM w0.254: J9.15 58.17,104.93 58.17,89.69 v1(57.12,88.65)
PC10_REST: length 35
  TOP w0.254: v1(57.05,84.94) 56.41,84.94 56.39,84.91 54.36,84.91 51.48,82.03 U2.51
  BOTTOM w0.254: v1(57.05,84.94) 57.05,87.58 58.95,89.48 58.95,103.18 J9.16
PC11_LED0: length 7.3
  TOP w0.254: R14.2 51.16,74.83 50.85,75.13 50.85,78.36 51.98,79.49 U2.52
STM32_REST: length 17
  TOP w0.254: v1(64.19,78.97) 64.17,78.96 KS_REST.1 64.17,74 64.19,73.99 C9.2 ; U2.7 63.92,85.99 v1(64.08,86.16)
  BOTTOM w0.254: v1(64.19,78.97) 64.19,79.6 64.08,79.71 v1(64.08,86.16)
SWCLK: length 29.1
  TOP w0.254: U2.49 v1(50.48,78.9)
  BOTTOM w0.254: v1(50.48,78.9) 50.48,63.88 JP_SWD1.2 57.04,56.29 57.05,56.27 57.05,54.99 T2.1
SWDIO: length 33.6
  TOP w0.254: U2.46 49.97,83.99 v1(50.32,83.64)
  BOTTOM w0.152: T1.1 54.25,54.58 54.48,54.81
  BOTTOM w0.254: 54.48,54.81 54.48,56.27 54.5,56.29 JP_SWD1.3 49.84,61.98 49.84,79.46 50.32,79.93 v1(50.32,83.64)
USART1_RX_PA10: length 44.4
  TOP w0.254: U2.43 50.43,85.49 v1(51.36,84.56)
  BOTTOM w0.152: 67.72,54.76 67.67,54.71 T4.1
  BOTTOM w0.254: 67.72,54.76 67.72,56.27 67.73,56.29 JS_USART1.3 66.46,58.6 59.23,58.6 51.36,66.47 v1(51.36,84.56)
USART1_TX_PA9: length 46.8
  TOP w0.254: v1(51.18,85.98) 50.55,85.98 50.53,85.99 U2.42
  BOTTOM w0.254: v1(51.18,85.98) 52.81,84.35 52.81,67.03 59.64,60.2 67.4,60.2 JS_USART1.2 70.27,56.29 70.26,56.27 70.26,55.22 T5.1
USART2_RXD: length 66.4
  TOP w0.254: U2.17 57.98,91.3 57.54,90.87 50.75,90.87 50.16,91.45 42.03,91.45 38.79,94.69 8.41,94.69 2.46,88.75 2.46,87.33 2.93,86.86 4.74,86.86 J4.19
USART2_TXD: length 59.9
  TOP w0.254: U2.16 58.94,90.49 58.91,90.46 50.58,90.46 50.1,90.93 41.15,90.93 38.56,93.52 9.41,93.52 J4.20
N201627: length 16.4
  TOP w0.508: C12.1 U3.8 76.23,63.5 v1(76.25,63.53) 76.25,69.88 76.43,70.05 D1.3
  BOTTOM w0.508: T3.1 76.25,61.9 v1(76.25,63.53)
N201649: length 5
  TOP w0.254: 79.32,61.04 Y2.2 ; 79.32,61.04 U3.1 ; 79.32,61.04 77.93,61.04 C14.2
N202031: length 5.5
  TOP w0.381: JP_SWD1.4 50.55,57.33 48.64,59.23 R8.1
N202175: length 11.5
  TOP w0.254: U2.6 65.6,85.49 66.95,86.84 Y1.2 69.34,86.84 69.8,86.39 C7.2
N202187: length 11.9
  TOP w0.254: U2.5 62.84,84.99 64.8,83.03 Y1.1 69.34,83.03 70.1,83.79 C8.2
N202733: length 10.2
  TOP w0.635: D1.1 86.77,69.88 86.79,69.9 JS_BAT1.1
N203157: length 7.9
  TOP w0.254: C13.2 83.21,61.04 Y2.1 81.47,61.95 81.46,61.97 81.46,63.86 80.37,64.95 U3.2
N208876: length 9.4
  TOP w0.635: U4.2 25.7,65.38 25.74,65.42 25.74,65.43 27.03,66.71 L1.2 27.03,68.99 28.35,70.31 28.59,70.31 28.6,70.32 D3.2
N211508: length 40.7
  TOP w0.254: U1.1 61.2,65.27 61.47,65.53 v1(62.1,65.53) ; v1(61.77,89.99) 61.47,89.69 61.47,89.68 61.28,89.49 U2.14
  BOTTOM w0.254: v1(62.1,65.53) 62.1,66.17 61.77,66.5 v1(61.77,89.99)
N214712: length 12.1
  TOP w0.381: J5.1 45.7,58.48 45.72,58.49 45.72,60.93 43.89,62.76 C5.1
  TOP w0.508: U1.6 43.75,65.27 43.64,65.15 R1.1 C5.1
N217465: length 9.8
  TOP w0.381: R7.1 104.48,83.72 104.49,83.74 J8.7
N217476: length 9.7
  TOP w0.381: R6.1 104.49,86.28 104.49,86.28 J8.6
N232980: length 54.4
  TOP w0.635: R9.1 15.91,110.11 16.71,110.92 66.36,110.92 67.18,110.1 J9.17
N235811: length 17.1
  BOTTOM w0.762: J2.3 80.24,21.93 J1.7
N235857: length 23.3
  BOTTOM w0.762: J2.1 66.88,15.52 66.88,12.39 66.94,12.33 J1.6
N261392: length 17.5
  TOP w0.635: R9.2 18.45,107.26 19.91,105.79 29.95,105.79 31.62,107.46 J9.3
N262227: length 2.9
  TOP w0.254: R14.1 LED1.1
N2617950: length 3
  TOP w0.254: R13.1 LED0.1

## Copper pours and planes (outline as drawn; the poured copper is in the pictures)
GND on TOP: 0.51,53.42 0.51,112.67 110.16,112.67 110.16,53.42
GND on TOP: 0.51,0.51 0.51,51.16 98.58,51.16 98.58,0.51
GND on BOTTOM: 0.51,53.34 0.51,112.67 110.16,112.67 110.16,53.34
GND on BOTTOM: 0.51,0.51 0.51,51.18 98.73,51.18 98.73,0.51

## Text on the board
Ref Des/Silkscreen Top: LCD | KEY | printer
